# Altium PCB FM25V20A_base.PcbDoc
Units mm, origin at the board's own origin, x right, y up, seen from the top; angles counter-clockwise.
Board outline 26.8 x 15.11 mm, 2 copper layers (Top Layer, Bottom Layer); 5 components, 8 nets, 19 pads, 9 vias.
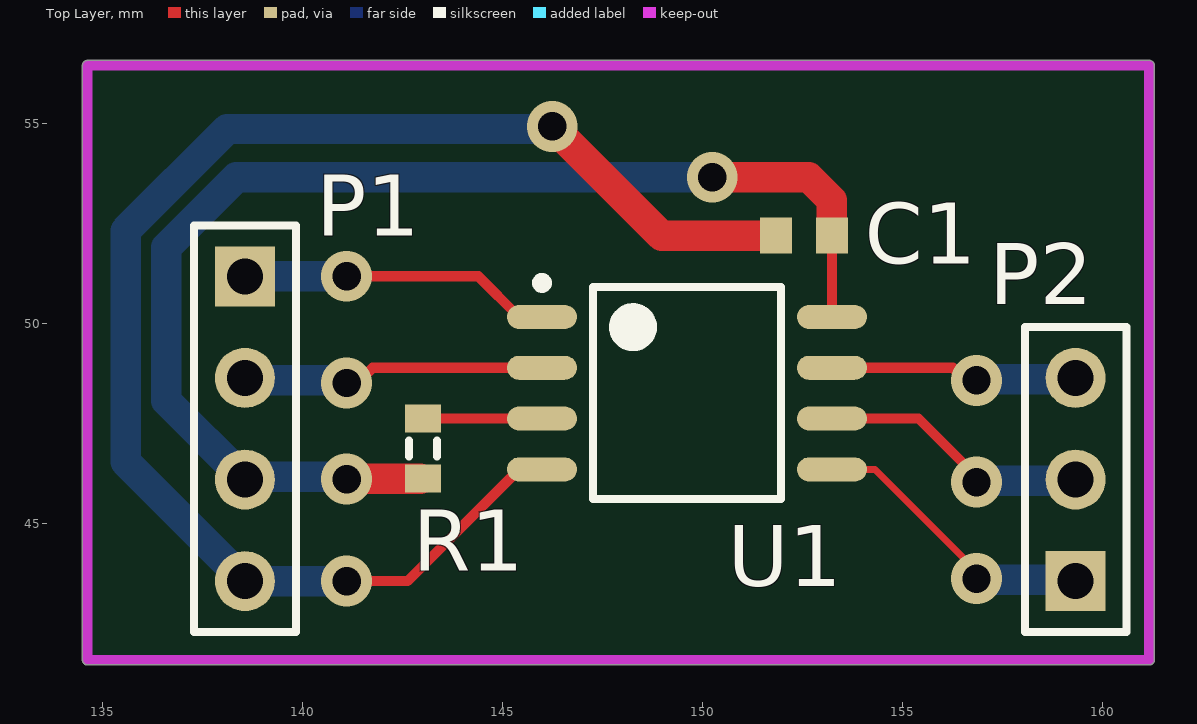
[diagram p0: Top Layer view]
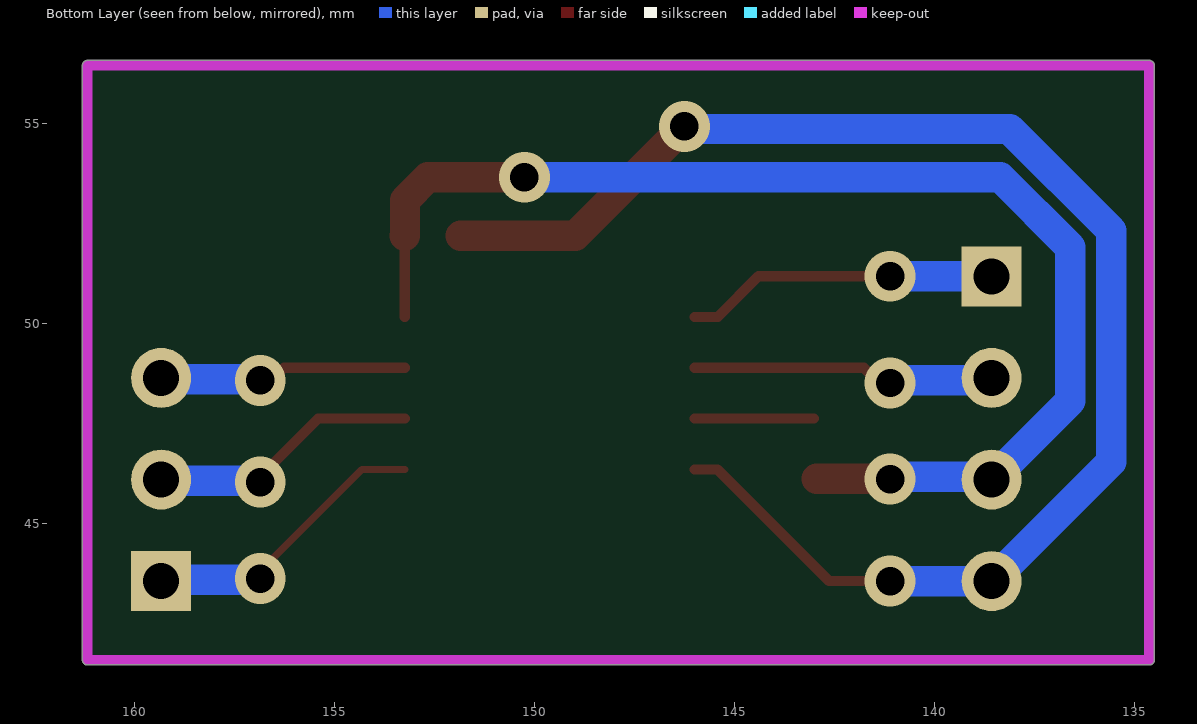
[diagram p1: Bottom Layer view, seen from below]

## Layer stack, top to bottom
Top Solder: solder mask 0.0102, Solder Resist, Dk 3.5
Top Layer: signal copper 0.0356
Dielectric 1: dielectric 0.32, FR-4, Dk 4.8
Bottom Layer: signal copper 0.0356
Bottom Solder: solder mask 0.0102, Solder Resist, Dk 3.5

## Board outline
134.493,41.593 ccw(c134.62,41.593) 134.62,41.465 161.163,41.465 ccw(c161.163,41.593) 161.29,41.593 161.29,56.451 ccw(c161.163,56.451) 161.163,56.579 134.62,56.579 ccw(c134.62,56.451) 134.493,56.451

## Design rules (kind name [scope] priority, off if disabled: settings)
Clearance [All] p1: gap=0.254 ignorepadtopadclearanceinfootprint=FALSE
PolygonConnect [All] p1: connectstyle=Relief reliefconductorwidth=0.254 reliefentries=4 polygonreliefangle="90 Angle" airgapwidth=0.254
RoutingVias [All] p1: holewidth=0.711 width=1.27 viastyle="Through Hole" minholewidth=0.711 minwidth=1.27 maxholewidth=0.711 maxwidth=1.27
SolderMaskExpansion [All] p1: expansion=0.102 istentingtop=FALSE
Width [All] p1: maxlimit=0.762 minlimit=0.178 preferedwidth=0.254 minimp=50.000000 maximp=50.000000 favimp=50.000000
30 further rules are at their usual default settings.

## Classes and differential pairs
component class FM25V20A_base: C1 R1 U1

## Components (designator, comment, footprint, x,y, rotation, side; value= is the part's Value field where it differs from the comment)
C1 "Cap Semi" 1608[0603] 152.531,52.197 r180 top value=0.1uF
P1 "OUTPUT1" HDR1X4 138.557,51.181 r270 top
P2 "OUTPUT2" HDR1X3 159.321,43.561 r90 top
R1 "Res3" J1-0603 143.002,46.875 r90 top value=10K
U1 "FM25V20AGTR" SOIC-8N 149.606,48.26 r0 top

## Footprints (in the part's own frame and the unit in brackets; to place one, negate y for a bottom-side part, rotate by r counter-clockwise, add the part's x,y. Pads: shape width x height; smd on the part's side, far side on the other; paste and mask are expansions set on the pad)
1608[0603] [mm] "Chip Capacitor, Body 1.6x0.8mm, IPC High Density"
  rect 0.8x0.9 smd: 1(-0.7,0) 2(0.7,0)
  body extent -0.87,-0.48 0.87,0.48, height 1.3
HDR1X3 [mm] "Connector; Header; 3 Position"
  rect 1.5x1.5 hole 0.9: 1(0,0)
  round 1.5 hole 0.9: 2(2.54,0) 3(5.08,0)
  silkscreen extent -1.27,-1.27 6.35,1.27
HDR1X4 [mm] "Connector; Header; 4 Position"
  rect 1.5x1.5 hole 0.9: 1(0,0)
  round 1.5 hole 0.9: 2(2.54,0) 3(5.08,0) 4(7.62,0)
  silkscreen extent -1.27,-1.27 8.89,1.27
J1-0603 [mm] "Chip Resistor, Body 1.6x0.8mm, IPC High Density"
  rect 0.7x0.9 smd: 1(-0.75,0) 2(0.75,0)
  silkscreen extent -0.2,-0.35 0.2,0.35, body extent -0.85,-0.48 0.85,0.48, height 0.9
SOIC-8N [mm] "for FM25V20A"
  oval 1.75x0.6 smd: 1(-3.625,1.905) 2(-3.625,0.635) 3(-3.625,-0.635) 4(-3.625,-1.905) 5(3.625,-1.905) 6(3.625,-0.635) 7(3.625,0.635) 8(3.625,1.905)
  silkscreen extent -3.75,-2.65 2.35,2.88, body extent -2.65,-2.65 2.65,2.65, height 2.03

## Part data
C1: "Capacitor (Semiconductor SIM Model)", LatestRevisionDate=29-May-2009, LatestRevisionNote="IPC-7351 Footprint Added.", PackageDescription="Chip Capacitor", PackageReference=C1206, Published=8-Jun-2000, Publisher="Altium Limited"
P1: library part "Header 4", "Header, 4-Pin", LatestRevisionDate=17-Jul-2002, LatestRevisionNote="Re-released for DXP Platform.", Publisher="Altium Limited"
P2: library part "Header 3", "Header, 3-Pin", LatestRevisionDate=17-Jul-2002, LatestRevisionNote="Re-released for DXP Platform.", Publisher="Altium Limited"
R1: "Resistor", LatestRevisionDate=29-May-2009, LatestRevisionNote="IPC-7351 Footprint Added.", PackageDescription="Chip Resistor", PackageReference=J1-0603, Published=8-Jun-2000, Publisher="Altium Limited"

## Via types
v1: diameter 1.27, hole 0.711, Top Layer to Bottom Layer, 9 vias

## Nets (pads, with @x,y where several pads share a name; then routed paths per layer and width w, separated by ;. In a path a pad name is that pad's centre, name@x,y a point inside that pad or via, vN(x,y) a via of type N, cw(c..) or ccw(c..) an arc to the next point about the centre after c; other vN are vias at no path point)
CSN_FRAM: P1.1 U1.1 | length 7.8
  Top Layer w0.254: v1(141.097,51.181) 144.39,51.181 145.406,50.165 U1.1
  Bottom Layer w0.762: P1.1 v1(141.097,51.181)
DNU: P2.3 U1.7 | length 6.2
  Top Layer w0.254: U1.7 156.253,48.895 156.57,48.578 v1(156.845,48.578)
  Bottom Layer w0.762: v1(156.845,48.578) 156.877,48.609 159.29,48.609 P2.3
GND: C1.2 P1.4 U1.4 | length 37
  Top Layer w0.254: v1(141.097,43.561) 142.621,43.561 145.415,46.355 U1.4
  Top Layer w0.762: v1(146.24,54.927) 148.971,52.197 C1.2
  Bottom Layer w0.762: v1(141.097,43.561) P1.4 135.572,46.545 135.572,52.324 138.112,54.864 146.177,54.864 v1(146.24,54.927)
NetR1_2: R1.2 U1.3 | length 3
  Top Layer w0.254: R1.2 U1.3
SPI2_MISO: P1.2 U1.2 | length 7.6
  Top Layer w0.254: v1(141.097,48.514) 141.372,48.514 141.753,48.895 U1.2
  Bottom Layer w0.762: P1.2 138.62,48.578 141.034,48.578 v1(141.097,48.514)
SPI2_MOSI: P2.1 U1.5 | length 7.4
  Top Layer w0.178: U1.5 154.305,46.355 156.845,43.815 v1(156.845,43.624)
  Bottom Layer w0.762: v1(156.845,43.624) 156.877,43.593 159.29,43.593 P2.1
SPI2_SCK: P2.2 U1.6 | length 6.9
  Top Layer w0.254: U1.6 155.395,47.625 156.845,46.175 v1(156.845,46.038)
  Bottom Layer w0.762: v1(156.845,46.038) 156.877,46.069 159.29,46.069 P2.2
VIN_3.3V: C1.1 P1.3 R1.1 U1.8 | length 31.5
  Top Layer w0.254: U1.8 C1.1
  Top Layer w0.762: v1(141.097,46.113) 141.103,46.119 R1.1@142.933,46.119 ; v1(150.241,53.657) 152.654,53.657 153.225,53.086 153.225,52.202 C1.1
  Bottom Layer w0.762: v1@141.034,46.164 138.62,46.164 P1.3 136.588,48.069 136.588,51.903 138.343,53.657 v1(150.241,53.657)

## Keep-outs
Keep-Out Layer:
  lines w0.254: 134.62,41.593 161.163,41.593 161.163,43.434 161.163,56.451 134.62,56.451 134.62,52.705 134.62,41.593

## Silkscreen, mask and mechanical layers (free items; w line width, h text height)
Mechanical 13:
  lines w0.254: 132.414,43.176 132.916,41.65 ; 132.465,54.86 132.979,56.382 ; 132.662,41.651 133.17,41.649 ; 132.725,56.383 133.233,56.381 ; 132.931,45.175 132.916,41.65 ; 132.964,52.856 132.979,56.382 ; 133.43,43.171 132.916,41.65 ; 133.481,54.856 132.979,56.382 ; 134.597,57.785 134.597,58.293 ; 136.121,57.531 134.597,58.039 ; 136.121,58.547 134.597,58.039 ; 143.998,58.039 134.597,58.039 ; 151.739,58.039 161.14,58.039 ; 159.616,57.531 161.14,58.039 ; 159.616,58.547 161.14,58.039 ; 161.14,57.785 161.14,58.293
  text "26.543 (mm)" at 144.252,57.532 h1.52
  text "14.732 (mm)" at 133.439,45.427 h1.52 r89.75